# Altium PCB 宁波2号线PIS_数字功率放大器_网络音频(BHC-A-2030-02)_PCB(06001537)_V1.0.PcbDoc (part 1 of 7)
Units mm, origin at the board's own origin, x right, y up, seen from the top; angles counter-clockwise.
Board outline 86 x 96 mm, 4 copper layers (Top Layer, GND, VDD, Bottom Layer); 204 components, 185 nets, 781 pads, 267 vias.
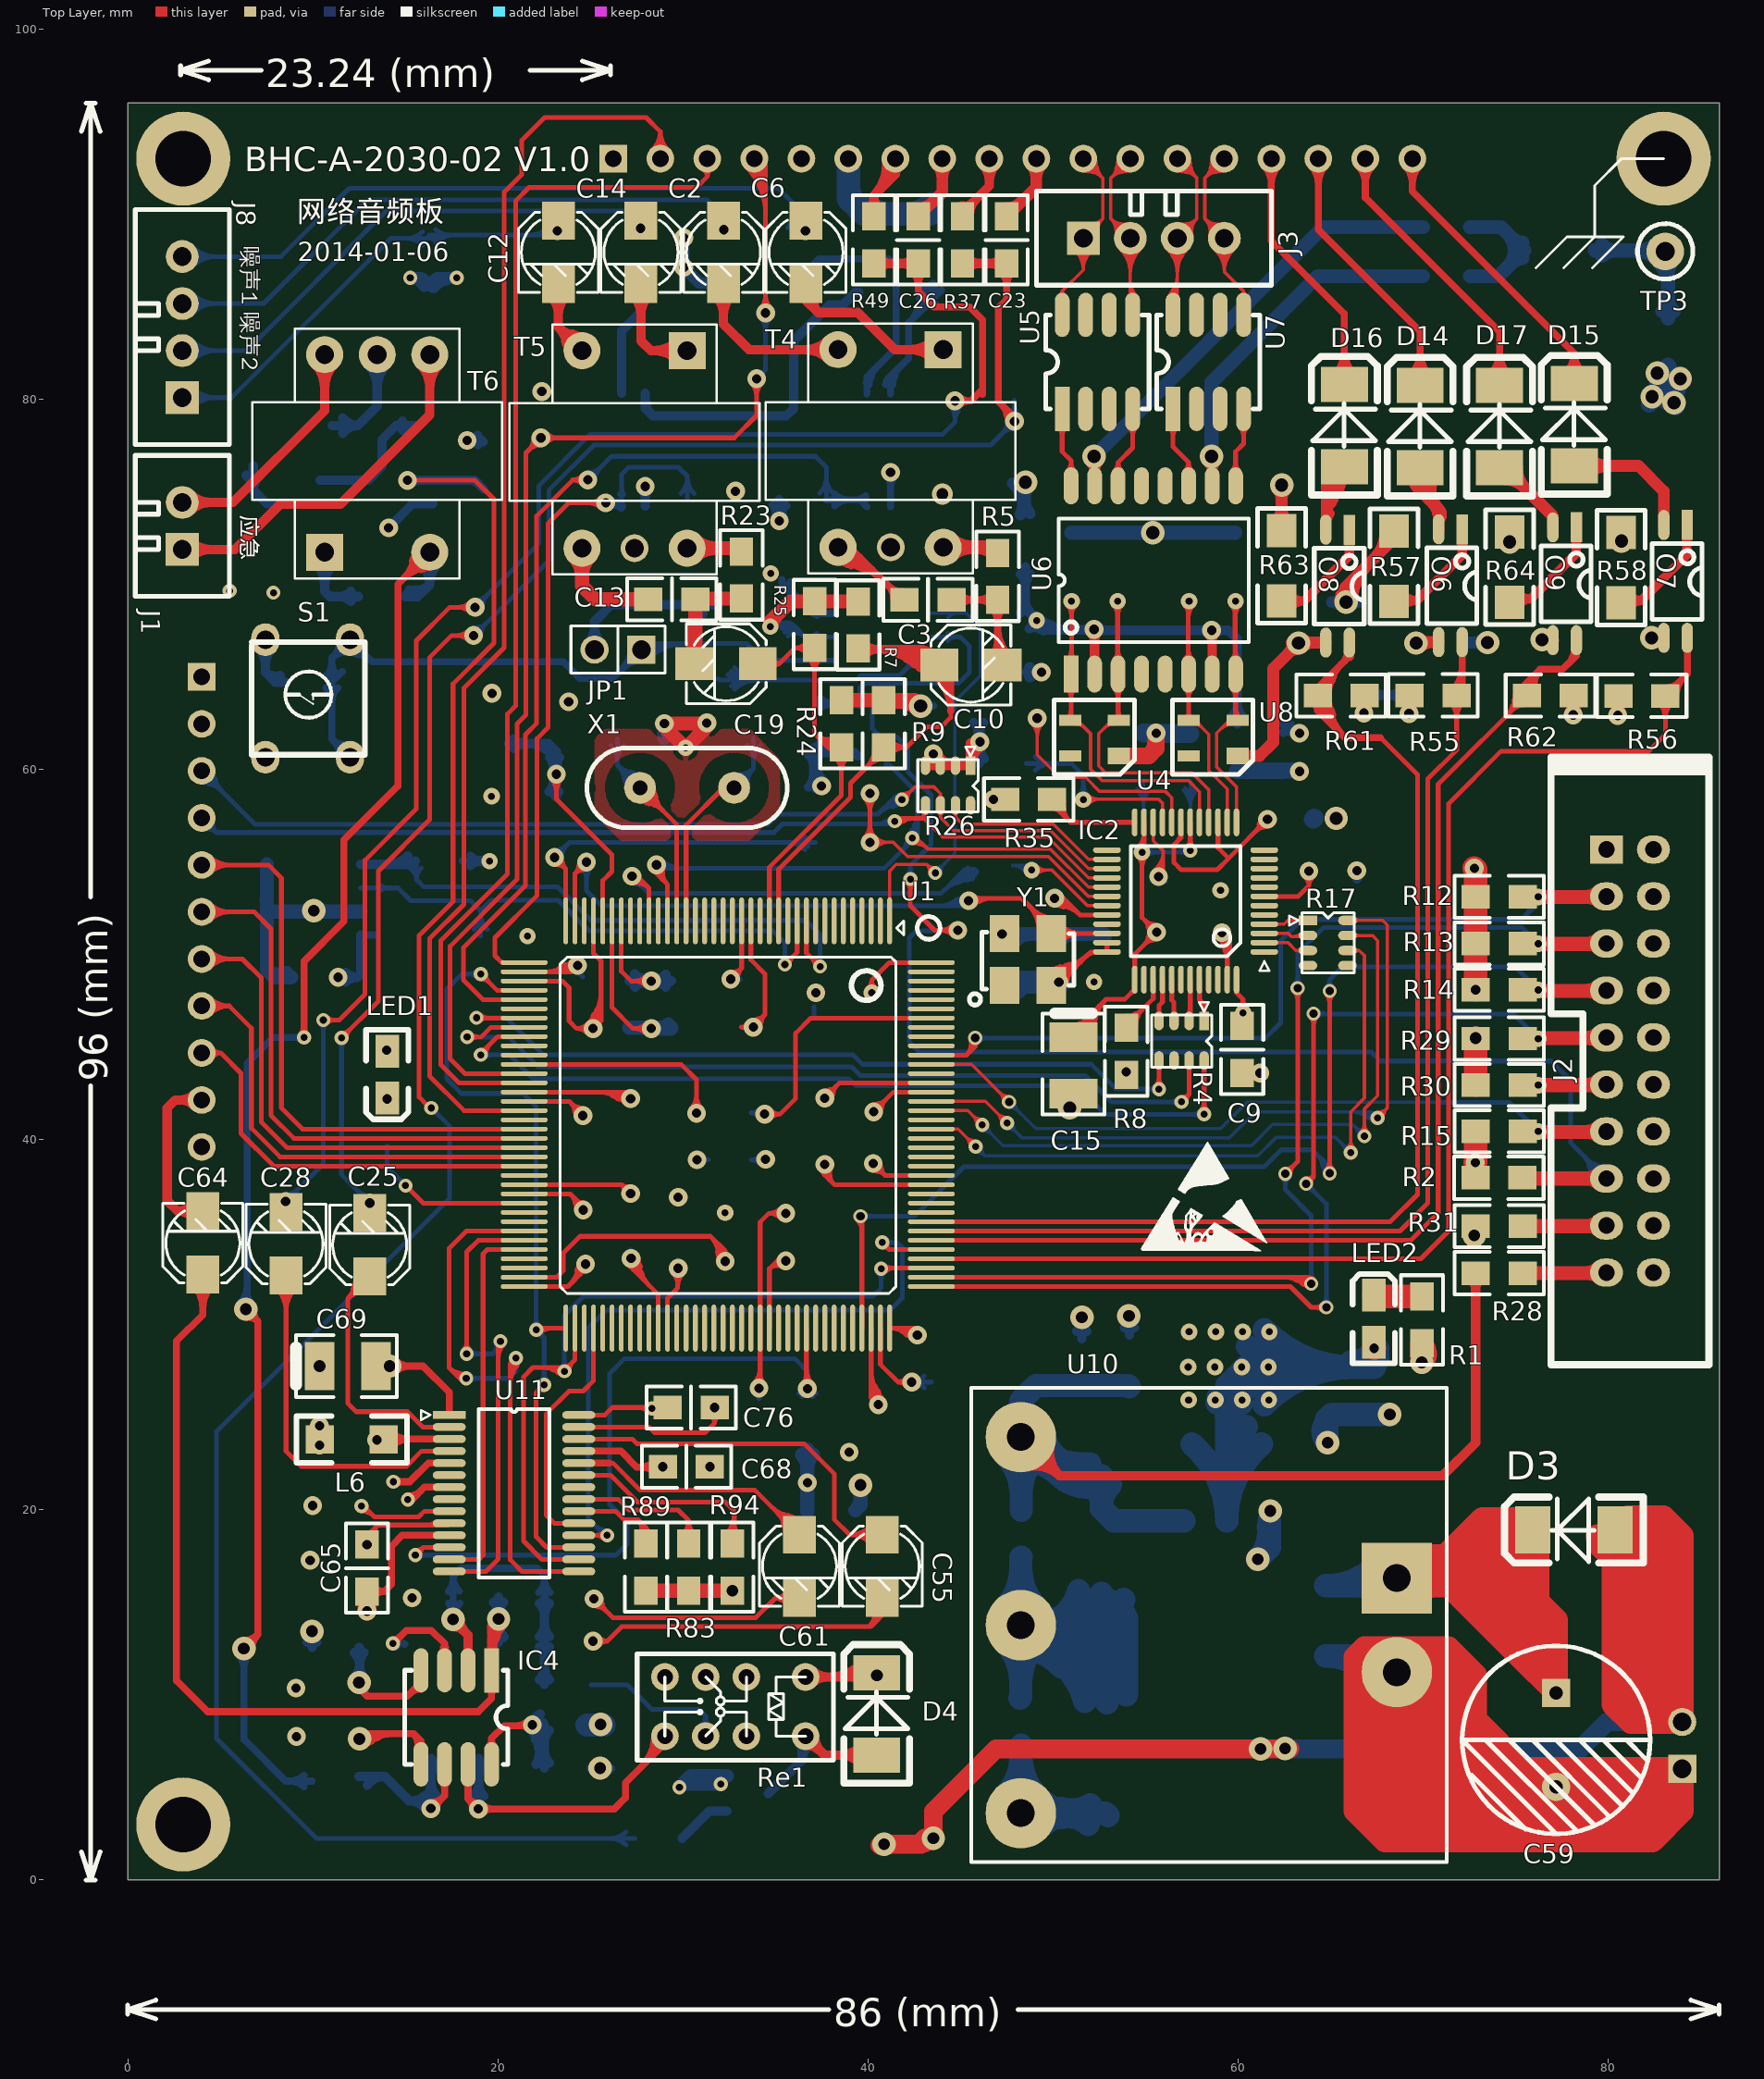
[diagram p0: Top Layer view]
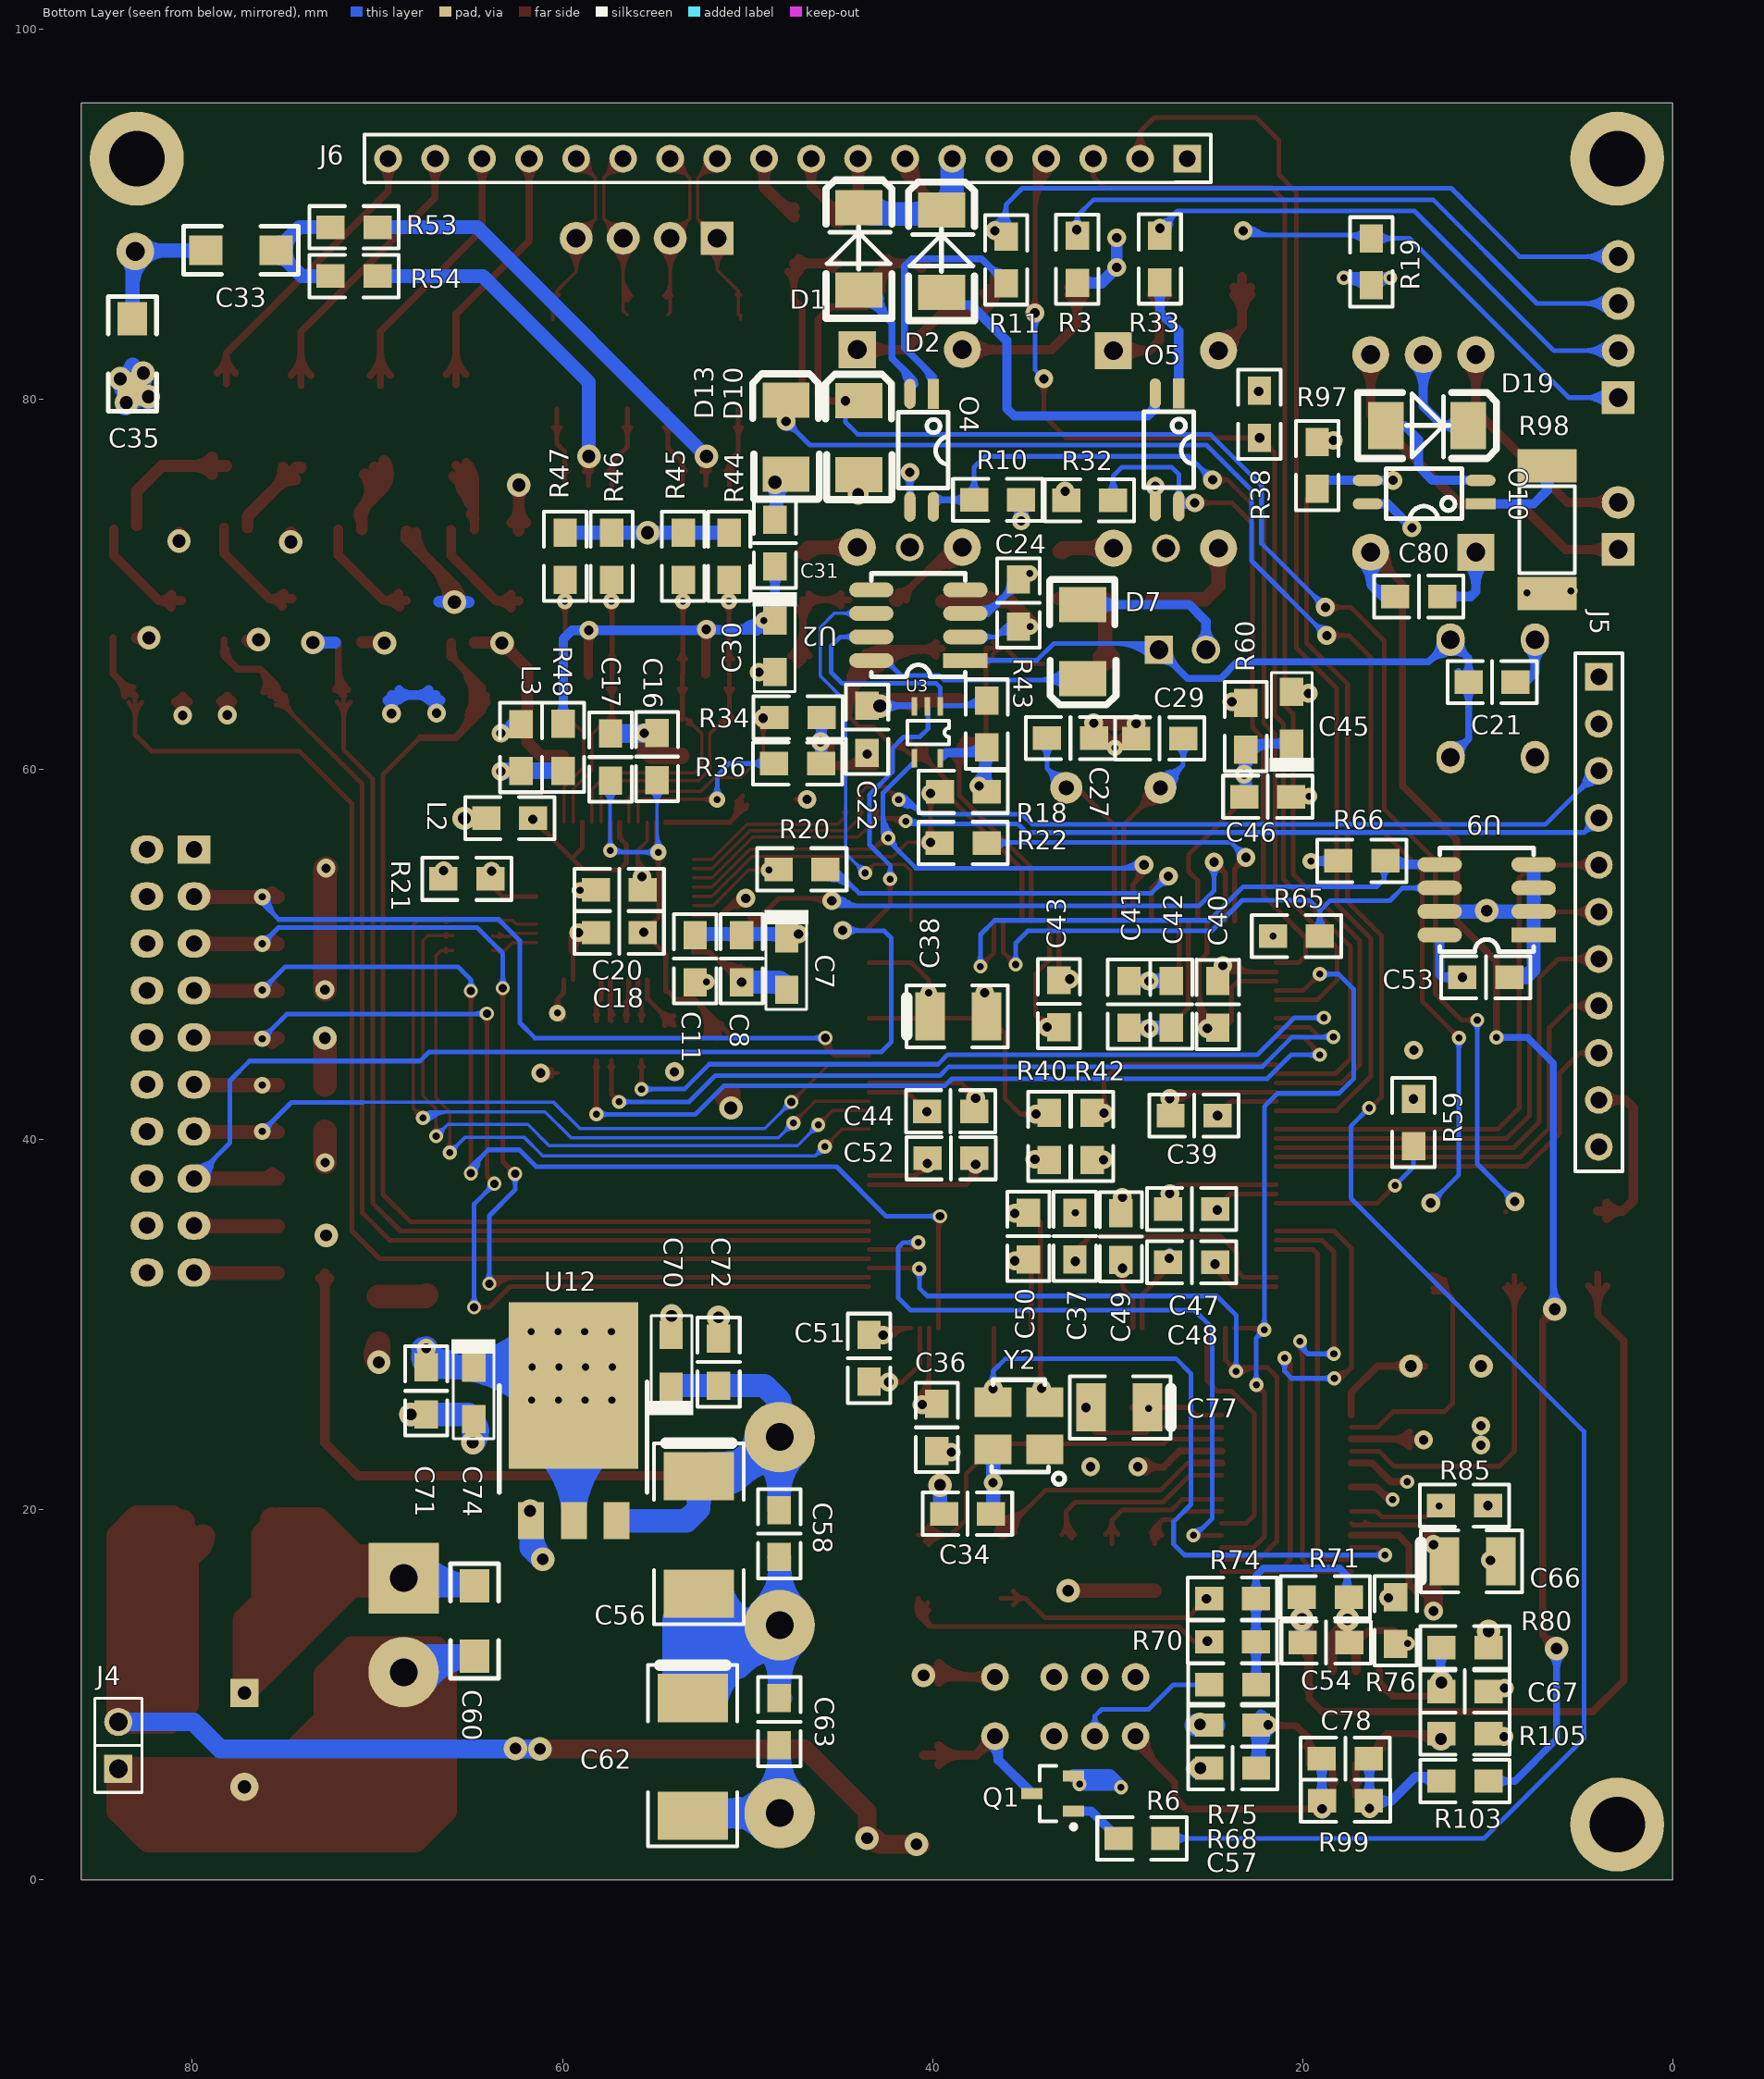
[diagram p1: Bottom Layer view, seen from below]
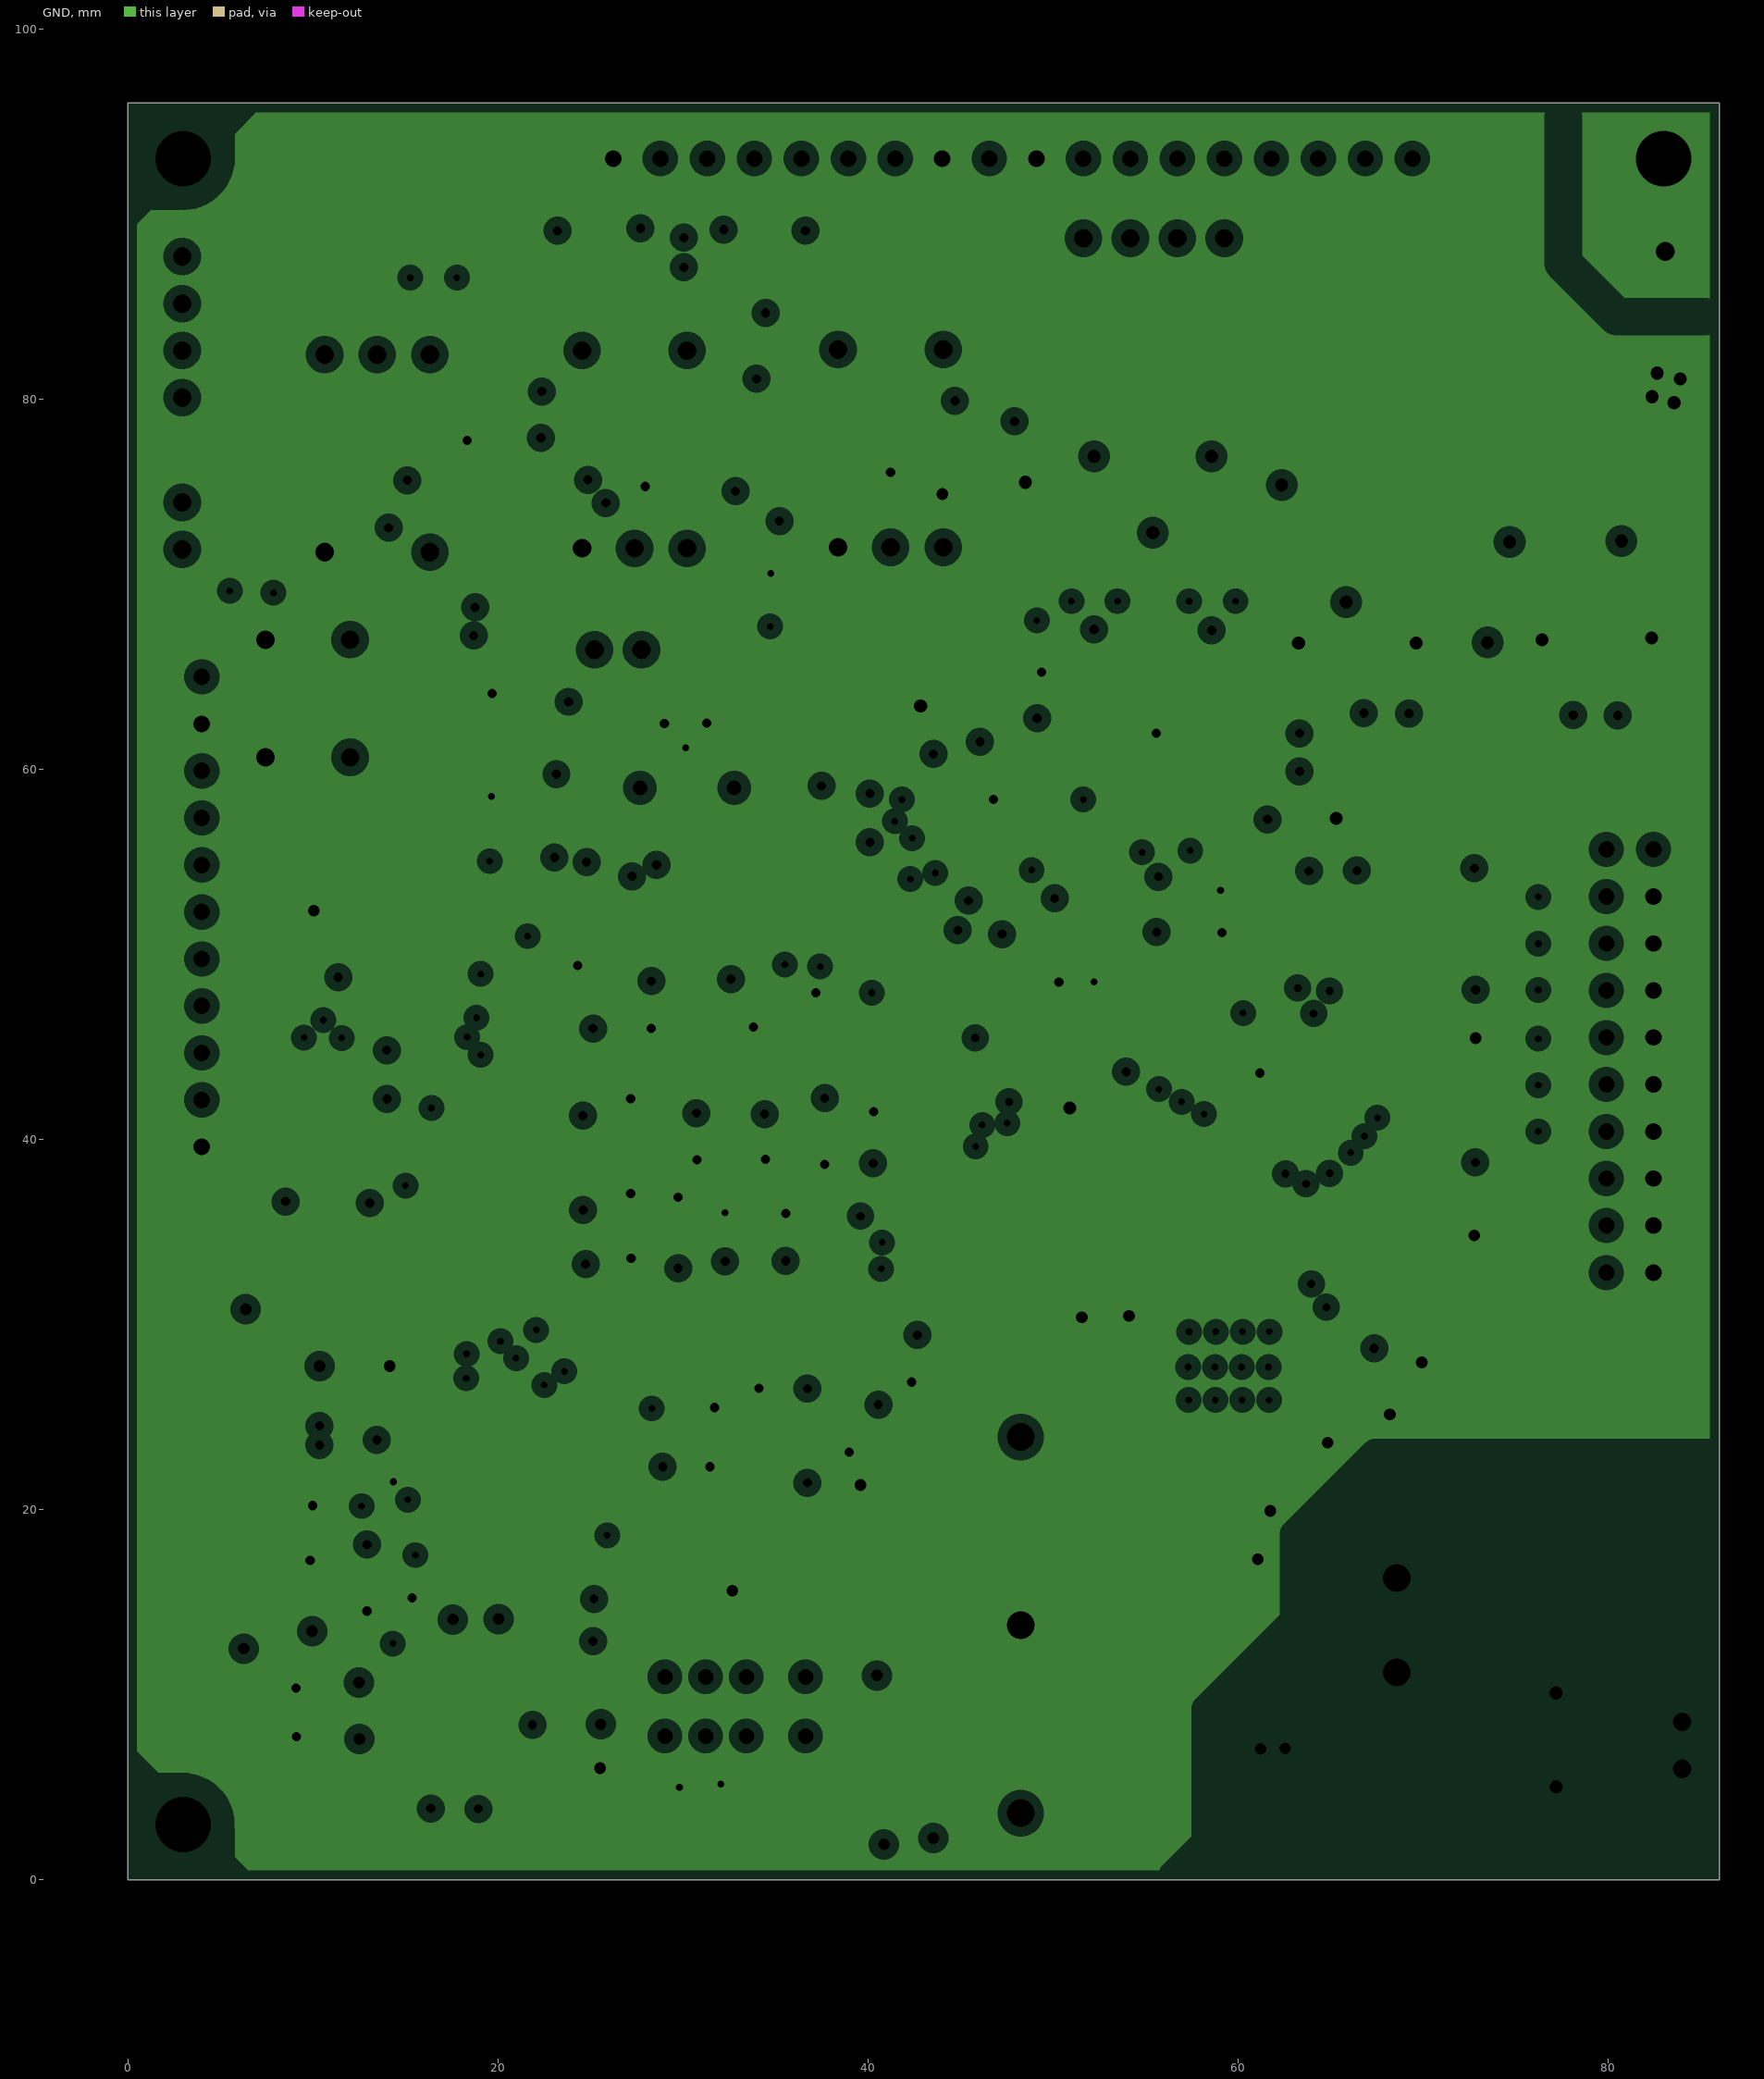
[diagram p2: GND, clearances drawn from the general rule]
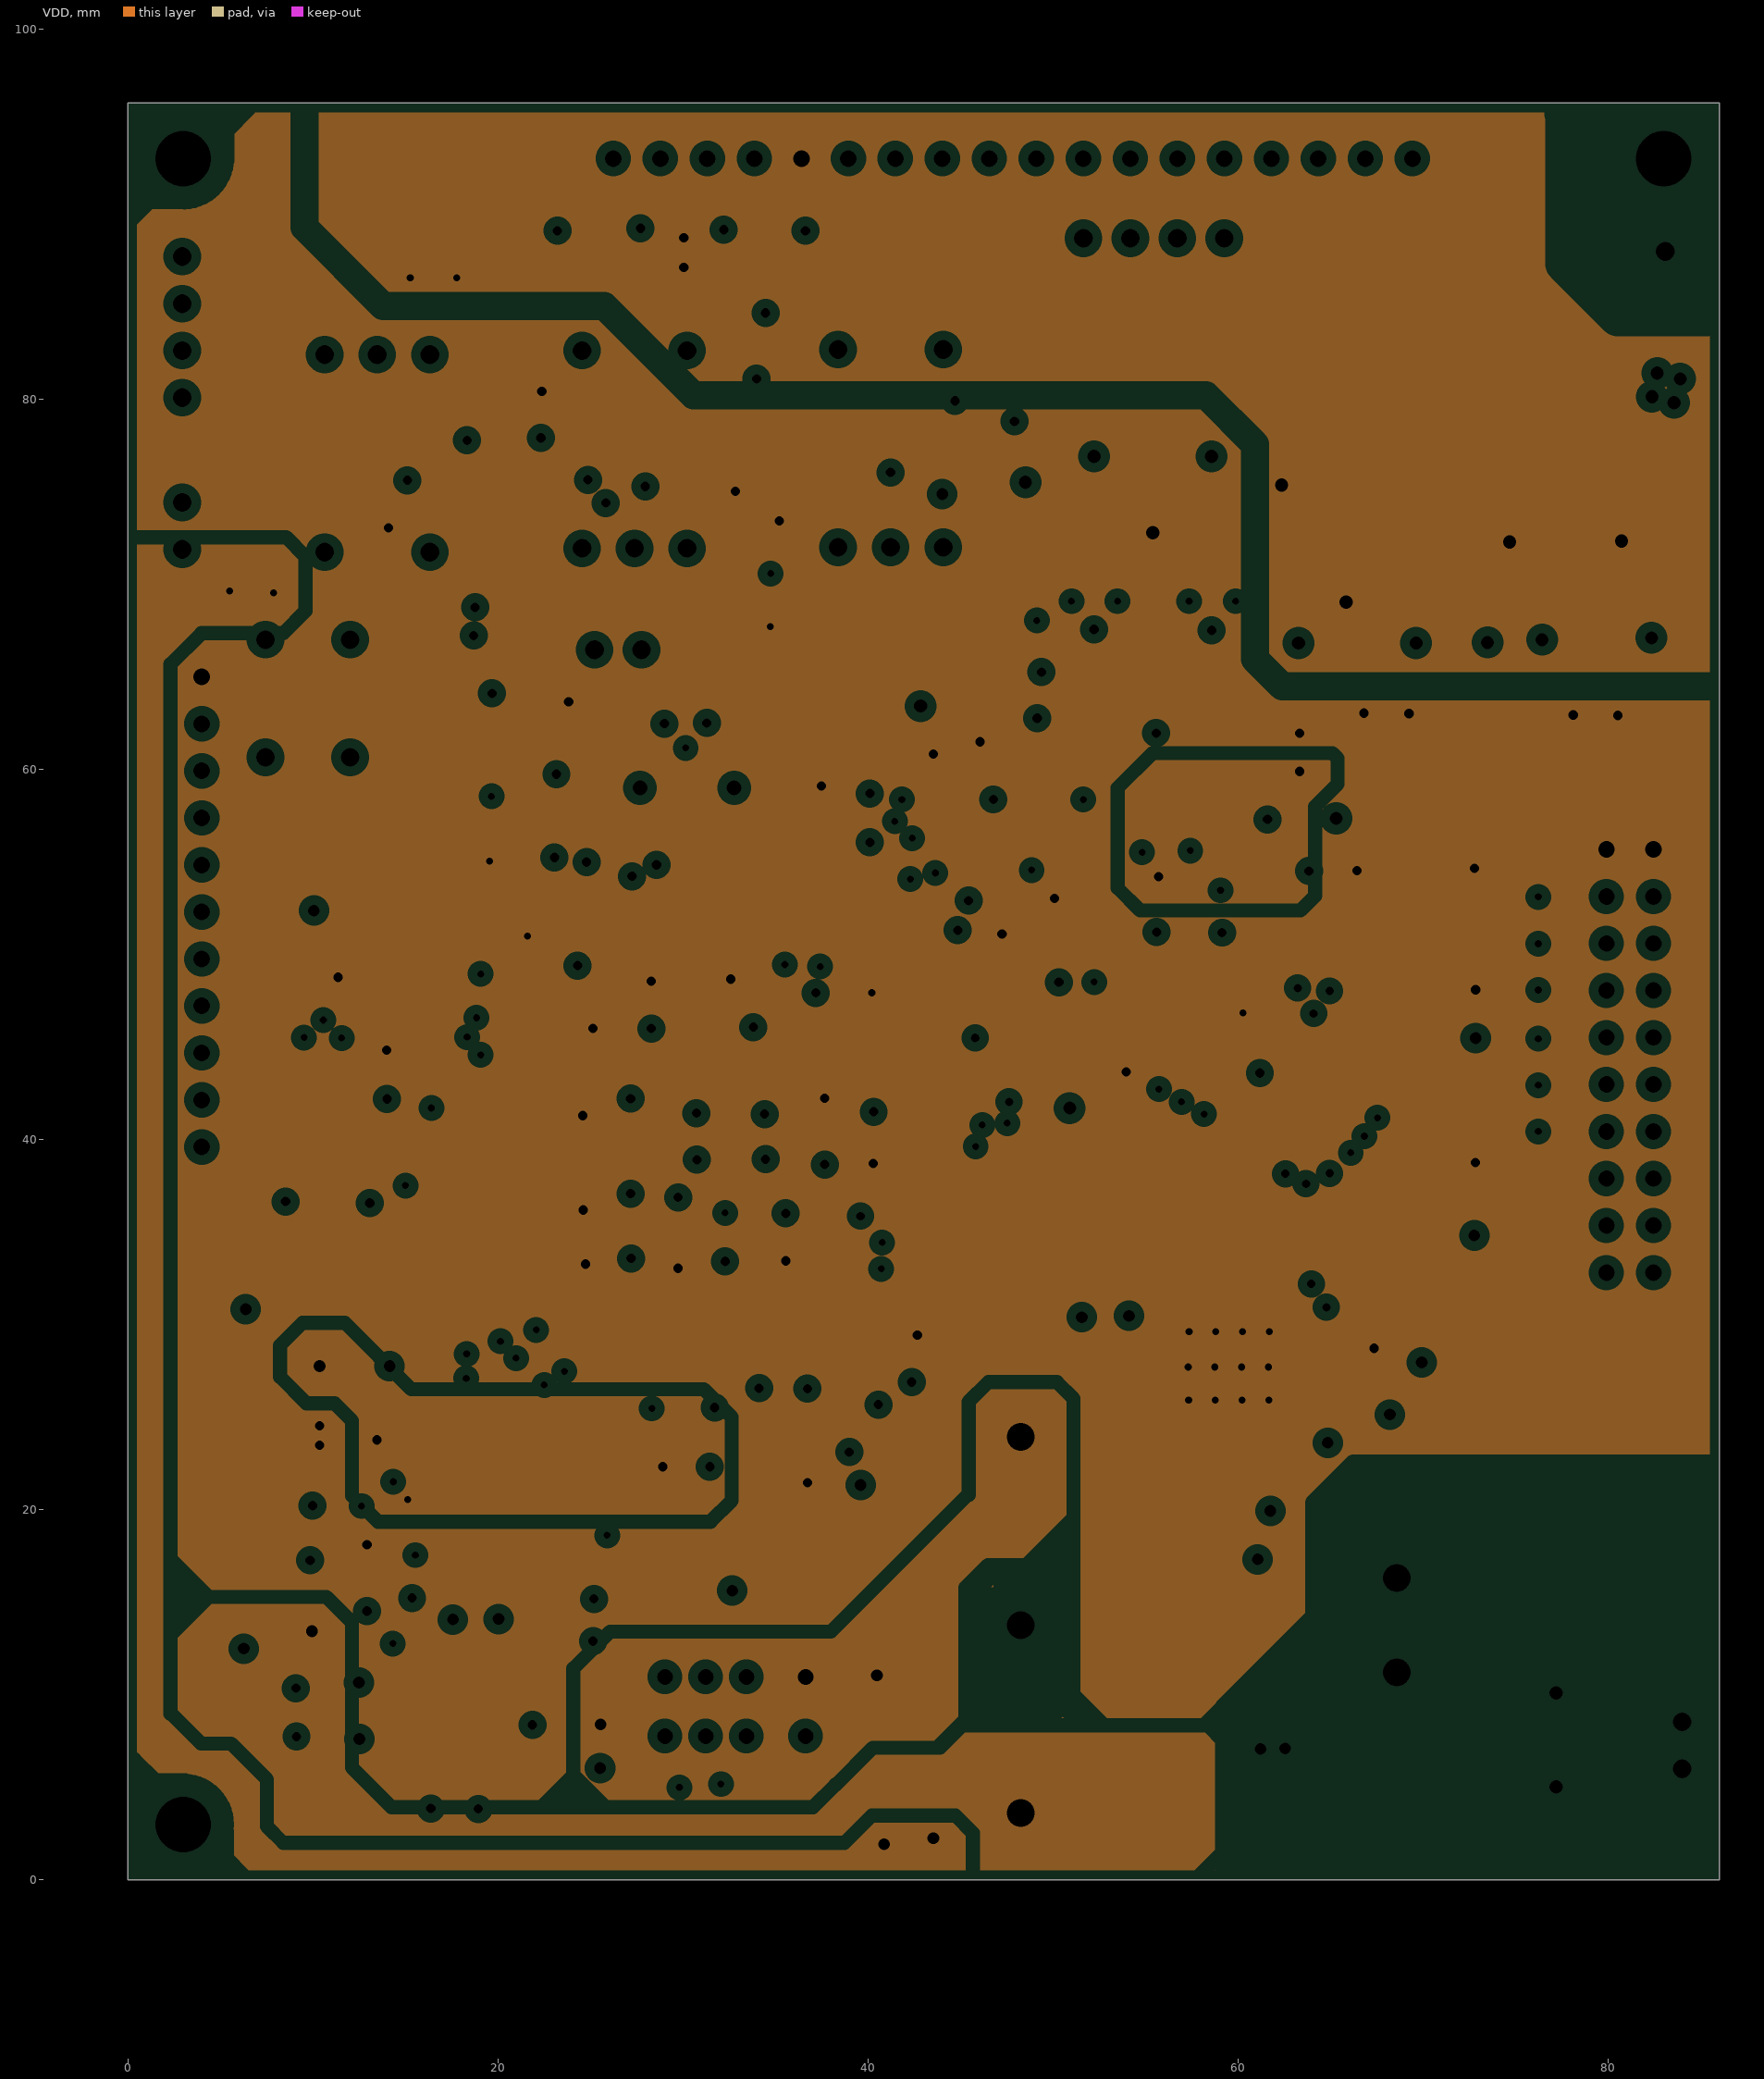
[diagram p3: VDD, clearances drawn from the general rule]
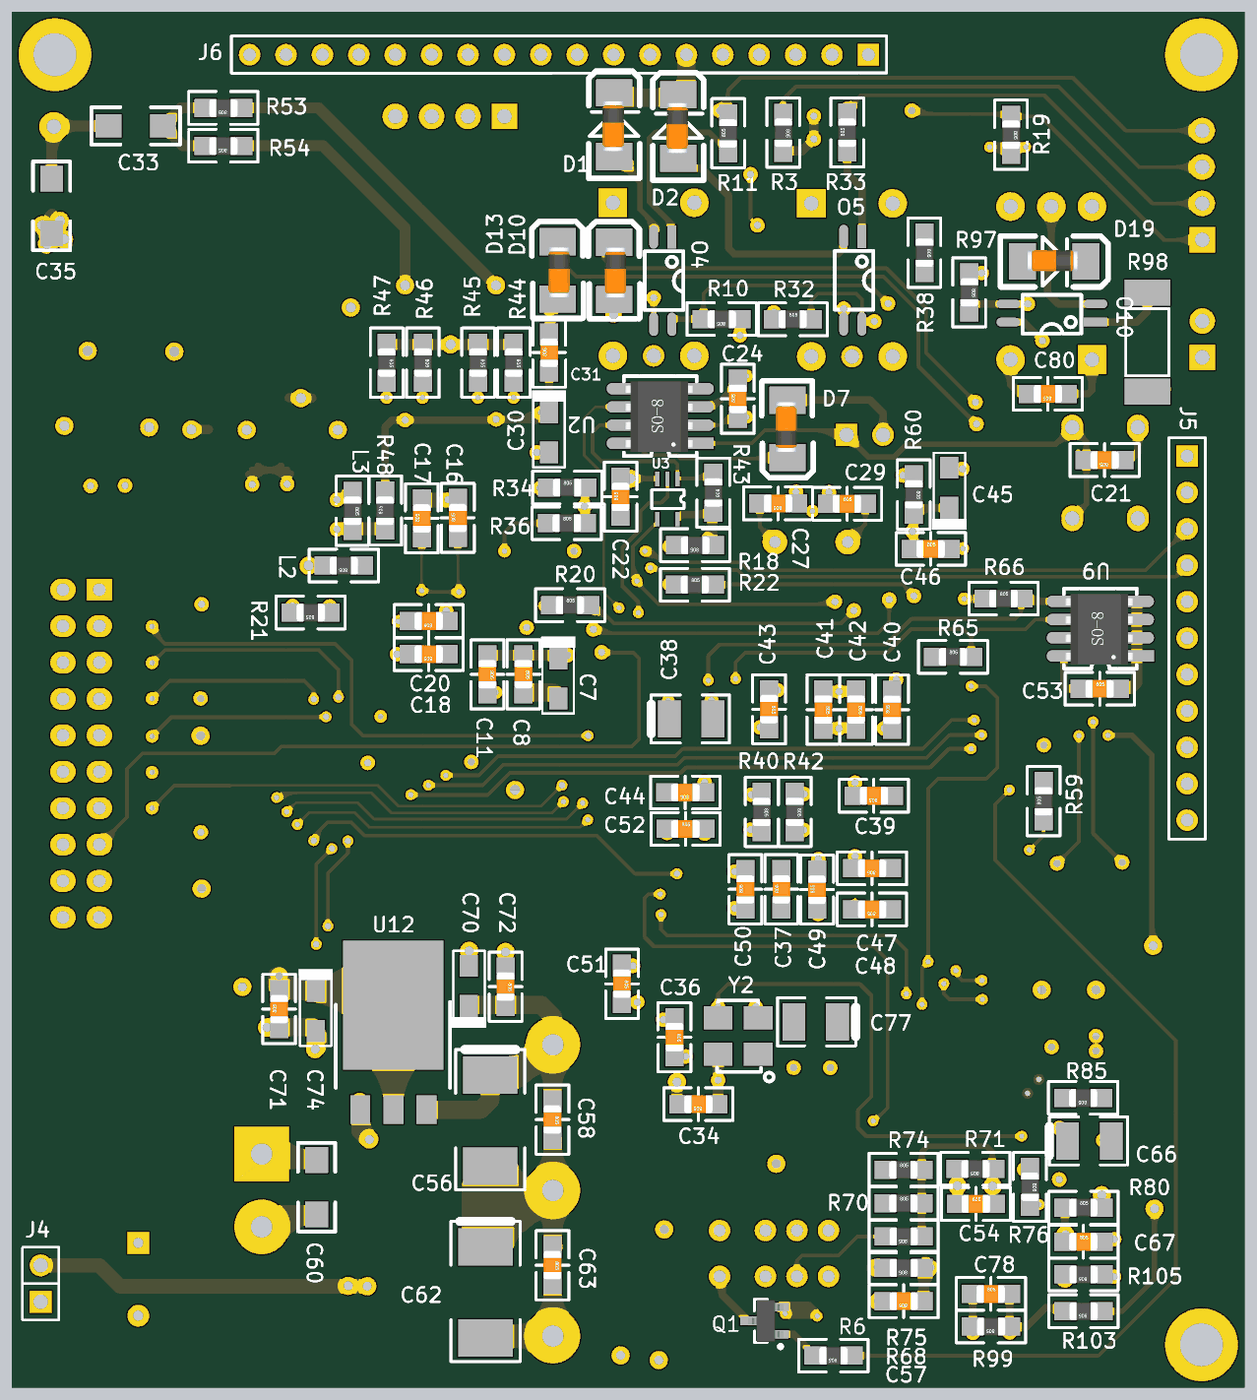
[diagram p10: 3D render of the assembled board from below, using the file's embedded part models]

## Layer stack, top to bottom
Top Layer: signal copper 0.0356
Dielectric: core 0.32, FR-4, Dk 4.8
GND: plane copper 0.0356, net (Multiple Nets)
Dielectric: prepreg 0.32, FR-4, Dk 4.8
VDD: plane copper 0.0356, net (Multiple Nets)
Dielectric: core 0.32, FR-4, Dk 4.8
Bottom Layer: signal copper 0.0356

## Board outline
0,0 0,96 86,96 86,0

## Design rules (kind name [scope] priority, off if disabled: settings)
Clearance [All] p1: gap=0.178
ComponentClearance [All] p1: gap=0 collisioncheckmode=3 verticalgap=0 showdistances=FALSE
DiffPairsRouting [All] p1: maxlimit=0.254 minlimit=0.254 mostfreqgap=0.254 maxuncoupledlength=12.7
HoleSize [All] p1: absolutevalues=TRUE maxlimit=12.7 minlimit=0.025 maxpercent=80.000 minpercent=20.000
HoleToHoleClearance [All] p1: gap=0 allowstackedmicrovias=TRUE
MinimumSolderMaskSliver [All] p1: minsoldermaskwidth=0
PlaneClearance [All] p1: clearance=0.508
PlaneConnect [All] p1: planeconnectstyle=Relief reliefexpansion=0.508 reliefentries=4 reliefconductorwidth=0.635 reliefairgap=0.381
PolygonConnect [All] p1: connectstyle=Relief reliefconductorwidth=0.254 reliefentries=4 polygonreliefangle="90 Angle" airgapwidth=0.254
RoutingVias [All] p1: holewidth=0.508 width=1.016 viastyle="Through Hole" minholewidth=0.381 minwidth=0.762 maxholewidth=0.711 maxwidth=1.27
SilkToSilkClearance [All] p1: silktosilkclearance=0
SilkToSolderMaskClearance [IsPad] p1: minsilkscreentomaskgap=0 clearancetoexposedcopper=TRUE
SolderMaskExpansion [All] p1: expansion=0.102
Width [All] p1: maxlimit=1.27 minlimit=0.178 preferedwidth=0.254 minimp=50.000000 maximp=50.000000 favimp=50.000000
19 further rules are at their usual default settings.

## Classes and differential pairs
component class 宁波2号线PIS-数字功率放大器（BHB-2430-02）-原理图-V0.1: J1 J4 J5 J6 J8 TP3
differential pair MB_TX: +MB_TX_P -MB_TX_N
differential pair MB_RX: +MB_RX_P -MB_RX_N
differential pair RD: +RD_P -RD_N
differential pair RX: +RX_P -RX_N
differential pair TD: +TD_P -TD_N
differential pair TX: +TX_P -TX_N

## Components (designator, comment, footprint, x,y, rotation, side; value= is the part's Value field where it differs from the comment)
C2 "10uF/25V" GC4*5.5 32.19,87.935 r90 top
C3 "" C0805 43.256,69.164 r0 top
C6 "10uF/25V" GC4*5.5 36.652,87.935 r90 top
C7 "" 3216A 47.879,49.479 r270 bottom
C8 "104" C0805 50.317,49.784 r90 bottom
C9 "104" C0805 60.223,44.856 r270 top
C10 "10uF/25V" GC4*5.5 45.568,65.634 r180 top
C11 "104" C0805 52.832,49.784 r90 bottom
C12 "10uF/25V" GC4*5.5 23.266,87.935 r90 top
C13 "" C0805 29.413,69.19 r0 top
C14 "10uF/25V" GC4*5.5 27.728,87.935 r90 top
C15 "10uF/16V" CAP-B 51.105,45.542 r270 top
C16 "104" C0805 54.889,60.681 r270 bottom
C17 "104" C0805 57.404,60.655 r270 bottom
C18 "104" C0805 56.921,51.181 r180 bottom
C19 "10uF/25V" GC4*5.5 32.334,65.71 r0 top
C20 "104" C0805 56.921,53.492 r180 bottom
C21 "102" C0805 9.754,64.719 r180 bottom
C22 "104" C0805 43.536,62.154 r270 bottom
C23 "" C0805 47.498,88.595 r270 top
C24 "104" C0805 35.357,68.986 r270 bottom
C25 "10uF/25V" GC4*5.5 13.081,34.315 r270 top
C26 "" C0805 42.717,88.595 r270 top
C27 "" C0805 32.537,61.697 r180 bottom
C28 "10uF/25V" GC4*5.5 8.56,34.366 r270 top
C29 "22pF" C0805 27.737,61.671 r0 bottom
C30 "10uF/10V" 3216A 48.514,66.65 r270 bottom
C31 "104" C0805 48.514,72.212 r270 bottom
C33 "1000p(2KV)" C1206 77.368,88.036 r180 bottom
C34 "104" C0805 38.1,19.787 r180 bottom
C35 "1000p(2KV)" C1206 83.236,82.448 r270 bottom
C36 "2.2uF" C0805 39.776,24.46 r90 bottom
C37 "2.2uF" C0805 32.309,34.773 r270 bottom
C38 "" CAP-B 40.132,46.66 r180 bottom
C39 "104" C0805 25.857,41.3 r180 bottom
C40 "104" C0805 24.587,47.295 r270 bottom
C41 "104" C0805 29.388,47.32 r90 bottom
C42 "104" C0805 27.102,47.32 r90 bottom
C43 "104" C0805 33.172,47.346 r90 bottom
C44 "104" C0805 39.014,41.529 r180 bottom
C45 "" 3216A 20.599,62.789 r90 bottom
C46 "104" C0805 21.895,58.522 r0 bottom
C47 "104" C0805 25.984,36.246 r180 bottom
C48 "104" C0805 25.984,33.376 r180 bottom
C49 "104" C0805 29.82,34.747 r270 bottom
C50 "104" C0805 34.823,34.773 r270 bottom
C51 "104" C0805 43.434,28.194 r90 bottom
C52 "104" C0805 39.014,38.989 r0 bottom
C53 "104" C0805 10.109,48.768 r0 bottom
C54 "47pF" C0805 18.745,12.827 r0 bottom
C55 "10uF/25V" GC4*5.5 40.767,16.942 r90 top
C56 "100uF/16V" CAP-D 52.629,21.819 r270 bottom
C57 "104" C0805 23.773,6.045 r180 bottom
C58 "104" C0805 48.285,18.72 r90 bottom
C59 "100uF/16V" E100 77.191,10.109 r270 top
C60 "" M1206 64.745,13.995 r90 bottom
C61 "10uF/25V" GC4*5.5 36.297,16.942 r90 top
C62 "100uF/16V" CAP-D 52.959,9.83 r270 bottom
C63 "104" C0805 48.285,8.56 r90 bottom
C64 "10uF/25V" GC4*5.5 4.064,34.417 r270 top
C65 "104" C0805 12.929,16.84 r270 top
C66 "10uF/16V" CAP-B 12.344,17.221 r180 bottom
C67 "104" C0805 11.244,10.185 r0 bottom
C68 "104" C0805 30.201,22.327 r0 top
C69 "10uF/16V" CAP-B 10.363,27.762 r0 top
C70 "10uF/10V" 3216A 54.127,28.042 r90 bottom
C71 "104" C0805 67.361,26.416 r270 bottom
C72 "104" C0805 51.562,27.991 r90 bottom
C74 "22uF/6.3V" 3216A 64.795,26.289 r270 bottom
C76 "104" C0805 30.455,25.527 r0 top
C77 "10uF/16V" CAP-B 28.397,25.526 r0 bottom
C78 "47pF" C0805 17.704,6.553 r0 bottom
C80 "100p" C0805 13.716,69.342 r180 bottom
D1 "DIODE" 7227AK 43.993,88.113 r90 bottom
D2 "DIODE" 7227AK 39.522,87.986 r90 bottom
D3 "DIODE" 7227AK 78.156,18.898 r180 top
D4 "1N4004" 7227AK 40.462,8.966 r90 top
D7 "" 1206AK 31.877,66.904 r270 bottom
D10 "" 1206AK 43.993,77.927 r90 bottom
D13 "" 1206AK 47.93,77.953 r90 bottom
D14 "DIODE" 7227AK 69.825,78.511 r90 top
D15 "DIODE" 7227AK 78.156,78.613 r90 top
D16 "DIODE" 7227AK 65.735,78.562 r90 top
D17 "DIODE" 7227AK 74.117,78.511 r90 top
D19 "DIODE" 7227AK 13.284,78.588 r180 bottom
IC2 "DP83848C" LQFP48 61.417,50.14 r180 top locked
IC4 "MC4558" SO-8 19.66,11.328 r270 top
J1 "CON2" CH2.54-2 2.946,71.882 r90 top
J2 "IDC20" IDC3-20 79.908,55.677 r270 top
J3 "CON4" CH2.54-4 51.638,88.697 r0 top locked
J4 "CON2" SIP2.54-2 84,6 r90 bottom locked
J5 "CON11" SIP2.54-11 4,65 r90 bottom
J6 "CON18" SIP2.54-18 26.24,93 r0 bottom
J8 "CON4" CH2.54-4 2.946,80.086 r90 top
JP1 "2.54-2P" SIP2.54-2 27.762,66.472 r180 top
L2 "100R@100M" M0805 62.84,57.353 r0 bottom
L3 "100R@100M" M0805 62.23,61.189 r270 bottom
L6 "10uH" L1206 13.818,23.8 r180 top
LED1 "" LED(贴片) 14.021,44.78 r90 top
LED2 "" LED(贴片) 67.335,29.058 r270 top
O4 "TLP281" SOP4 39.954,80.289 r270 bottom
O5 "TLP281" SOP4 26.695,80.315 r270 bottom
O6 "TLP281" SOP4 72.111,72.974 r270 top
O7 "TLP281" SOP4 84.277,73.203 r270 top
O8 "TLP281" SOP4 66.015,72.949 r270 top
O9 "TLP281" SOP4 78.283,73.076 r270 top
O10 "TLP281" SOP4 10.389,74.346 r0 bottom
Q1 "MMBT5551" SOT-23B_N 33.503,4.674 r0 bottom
R1 "" M0805 69.926,30.251 r90 top
R2 "10K" M0805 74.092,37.948 r0 top
R3 "" M0805 32.172,87.565 r270 bottom
R4 "33*4" PZ-4-0.8B 58.166,46.152 r180 top
R5 "" M0805 47.015,70.434 r270 top
R6 "Res3" M0805 28.677,2.235 r0 bottom
R7 "" M0805 39.472,67.793 r90 top
R8 "10K" M0805 53.95,44.755 r90 top
R9 "" M0805 40.843,62.459 r90 top
R10 "" M0805 36.474,74.549 r0 bottom
R11 "" M0805 36.032,87.514 r90 bottom
R12 "10K" M0805 74.117,53.111 r180 top
R13 "10K" M0805 74.101,50.597 r0 top
R14 "10K" M0805 74.117,48.082 r180 top
R15 "10K" M0805 74.117,40.437 r180 top
R17 "33*4" PZ-4-0.8B 64.033,51.841 r270 top
R18 "10K" M0805 38.329,58.776 r0 bottom
R19 "" M0805 16.281,87.427 r270 bottom
R20 "" M0805 47.066,54.61 r180 bottom
R21 "10K" M0805 65.151,54.077 r0 bottom
R22 "" M0805 38.354,56.032 r180 bottom
R23 "" M0805 33.172,70.51 r270 top
R24 "" M0805 38.557,62.459 r90 top
R25 "" M0805 37.109,67.818 r90 top
R26 "" PZ-4-0.8B 45.542,59.944 r180 top
R28 "0R" M0805 74.101,32.791 r0 top
R29 "10K" M0805 74.101,45.466 r0 top
R30 "10K" M0805 74.101,42.955 r0 top
R31 "10K" M0805 74.101,35.331 r0 top
R32 "" M0805 31.521,74.549 r180 bottom
R33 "" M0805 27.727,87.565 r90 bottom
R34 "10K" M0805 47.269,62.814 r180 bottom
R35 "" M0805 48.692,58.369 r180 top
R36 "10K" M0805 47.295,60.325 r180 bottom
R37 "" M0805 45.116,88.613 r270 top
R38 "" M0805 22.327,79.197 r270 bottom
R40 "10K" M0805 33.68,40.183 r270 bottom
R42 "10K" M0805 31.369,40.183 r270 bottom
R43 "" M0805 37.059,62.459 r270 bottom
R44 "" M0805 50.978,71.526 r270 bottom
R45 "" M0805 53.467,71.526 r270 bottom
R46 "" M0805 57.328,71.526 r270 bottom
R47 "" M0805 59.842,71.526 r270 bottom
R48 "" M0805 59.969,61.189 r90 bottom
R49 "" M0805 40.335,88.613 r270 top
R53 "" M0805 71.247,89.281 r0 bottom
R54 "" M0805 71.247,86.639 r0 bottom
R55 "" M0805 70.536,64.008 r0 top
R56 "" M0805 81.813,63.983 r0 top
R57 "" M1206 68.428,70.968 r90 top
R58 "" M1206 80.696,70.891 r90 top
R59 "" M0805 14.021,40.919 r90 bottom
R60 "" M0805 23.063,62.332 r270 bottom
R61 "" M0805 65.583,63.983 r180 top
R62 "" M0805 76.886,63.983 r180 top
R63 "" M1206 62.357,70.993 r90 top
R64 "" M1206 74.676,70.917 r90 top
R65 "" M0805 20.345,51.003 r180 bottom
R66 "" M0805 16.815,55.067 r180 bottom
R68 "100R" M0805 23.774,8.357 r0 bottom
R70 "15k" M0805 23.8,12.878 r180 bottom
R71 "11k" M0805 18.771,15.265 r0 bottom
R74 "10k" M0805 23.8,15.215 r180 bottom
R75 "10k" M0805 23.774,10.541 r0 bottom
R76 "10k" M0805 14.961,14.021 r270 bottom
R80 "100R" M0805 11.243,12.573 r180 bottom
R83 "" M0805 30.302,16.891 r90 top
R85 "" M0805 11.252,20.218 r0 bottom
R89 "" M0805 27.991,16.891 r90 top
R94 "" M0805 32.664,16.891 r90 top
R97 "" M0805 19.202,76.429 r270 bottom
R98 "" 1T-2512 6.782,72.949 r270 bottom
R99 "11k" M0805 17.678,4.267 r0 bottom
R103 "10k" M0805 11.227,5.334 r0 bottom
R105 "10k" M0805 11.227,7.899 r0 bottom
Re1 "AGN20012 G6J-2P-Y" G6J-2P 36.627,10.973 r270 top
S1 "SW-PB" KEY-6A 9.728,63.83 r270 top
T4 "EE13" EE13-C#1 44.069,82.677 r270 top locked
T5 "EE13" EE13-C#1 30.226,82.626 r270 top locked
T6 "1:1" EE13-C#2 10.643,71.73 r90 top
TP3 "TP" TP 83.083,87.986 r0 top
U1 "STM32F207Zx" LQFP144 41.173,51.816 r180 top locked
U2 "MAX706R" so-8 38.227,65.888 r0 bottom
U3 "74LVC1G08" SOT-23-5+ 39.573,63.398 r270 bottom
U4 "SR3.3" SOT-143 53.569,60.731 r90 top
U5 "PLC03-3.3" SO-8 50.495,79.477 r90 top
U6 "H1102" SOP-16 50.978,65.151 r90 top
U7 "PLC03-3.3" SO-8 56.49,79.477 r90 top
U8 "SR3.3" SOT-143 59.969,60.731 r90 top
U9 "AT24C32-2.7" SO-8 7.518,51.054 r0 bottom
U10 "" YND5-48D12 68.58,13.767 r180 top locked
U11 "UDA1341TS" TSSOP28N 17.374,25.121 r0 top
U12 "AS2815AR-3.3" TO-252-1 61.697,19.406 r180 bottom
X1 "25MHz" XTAL-D 27.686,59.004 r0 top
Y1 "50MHz" XTAL-XO53 47.371,48.336 r0 top
Y2 "11.2896MHz" XTAL-XO53 33.934,23.266 r90 bottom

## Footprints (in the part's own frame and the unit in brackets; to place one, negate y for a bottom-side part, rotate by r counter-clockwise, add the part's x,y. Pads: shape width x height; smd on the part's side, far side on the other; paste and mask are expansions set on the pad)
1T-2512 [mm] "Chip Resistor; Body 6.4 x 3.2 mm (LxW typ)"
  rect 1.8x3.2 smd: 1(-3.45,0) 2(3.45,0)
  silkscreen extent -2.35,-1.5 2.35,1.5, body extent -3.66,-1.5 3.66,1.5, height 1
1206AK [mm]
  rect 1.905x2.54 smd: A(-2,-0.013) K(2,-0.013)
  silkscreen extent -3.35,-1.8 3.42,1.79, body extent -1.88,-0.85 1.62,0.65, height 0.75
3216A [mil]
  rect 60x50 smd: 1(-55,0) 2(55,0)
  silkscreen extent -115,-48 96,46
7227AK [mm]
  rect 1.905x2.54 smd: A(-2.216,-0.013) K(2.229,-0.013)
  silkscreen extent -3.74,-1.79 3.75,1.77, body extent -1.85,-0.7 1.65,0.8, height 1.45
C0805 [mil]
  rect 60x50 smd: 1(-50.36,-0.05) 2(49.64,-0.05)
  silkscreen extent -95,-45 95,45, body extent -39,-25 39,25, height 31
C1206 [mm]
  rect 1.8x1.6 smd: 1(-1.9,0) 2(1.9,0)
  silkscreen extent -3.1,-1.3 3.1,1.3, body extent -1.96,-1.3 1.9,1.3, height 1.5
CAP-B [mm] "钽电容10uF/10V"
  rect 1.6x2.6 smd: 1(0,0) 2(3.048,0)
  silkscreen extent -1.27,-1.68 4.19,1.68
CAP-D [mm] "钽电容100uF/16V"
  rect 2.6x3.8 smd: 1(0,0) 2(6.35,0)
  silkscreen extent -1.78,-2.41 8,2.41
CH2.54-2 [mil]
  rect 70x70 hole 40: 1(0,0)
  round 70 hole 40: 2(100,0)
  silkscreen extent -100,-100 200,100, body extent -100,-100 200,100, height 276
CH2.54-4 [mil]
  rect 70x70 hole 40: 1(0,0)
  round 70 hole 40: 2(100,0) 3(200,0) 4(300,0)
  silkscreen extent -100,-100 400,100
E100 [mil]
  rect 60x60 hole 28: 1(0,0)
  round 60 hole 28: 2(200,0)
  silkscreen extent -100,-200 300,200
EE13-C#1 [mm]
  rect 2x2 hole 1.016: 1(0,0)
  round 2 hole 1.016: 2(0,-5.68) 3(10.68,0) 5(10.68,-5.68)
  round 1.5 hole 1.016: 4(10.68,-2.84)
  silkscreen extent -1.41,-9.59 12.09,3.91, body extent -1.41,-9.59 12.09,3.91, height 9.35
EE13-C#2 [mm]
  rect 2x2 hole 1.016: 1(0,0)
  round 2 hole 1.016: 2(0,-5.68) 3(10.68,0) 4(10.68,-2.84) 5(10.68,-5.68)
  silkscreen extent -1.41,-9.59 12.09,3.91, body extent -1.41,-9.59 12.09,3.91, height 9.35
G6J-2P [mm] "W5.7*L10.6*H9"
  round 1.5 hole 0.85: 1(0,0) 2(0,-3.2) 3(0,-5.4) 4(0,-7.6) 5(3.2,-7.6) 6(3.2,-5.4) 7(3.2,-3.2) 8(3.2,0)
  silkscreen extent -1.25,-9.1 4.5,1.5
GC4*5.5 [mil]
  rect 80x70 smd: 1(67.2,-0.18) 2(-67.8,-0.18)
  silkscreen extent -85,-85 85,85
IDC3-20 [mil] "JTAG"
  rect 60x70 hole 35: 1(0,0)
  oval 60x70 hole 35: 2(0,100) 3(100,0) 4(100,100) 5(200,0) 6(200,100) 7(300,0) 8(300,100) 9(400,0) 10(400,100) 11(500,0) 12(500,100) 13(600,0) 14(600,100) 15(700,0) 16(700,100) 17(800,0) 18(800,100) 19(900,0) 20(900,100)
  silkscreen extent -196,-118 1096,218
KEY-6A [mil]
  oval 70x60 hole 40: 1(-125,-90) 1(125,-90) 2(-125,90) 2(125,90)
  silkscreen extent -120,-119 120,121
L1206 [mil] "10uH"
  rect 60x60 smd: 1(0,0) 2(135,0)
  silkscreen extent -50,-50 185,50
LED(贴片) [mil]
  rect 70x50 smd: 1(0,0) 2(-100,0)
  silkscreen extent -145,-45 45,45
LQFP48 [mm]
  oval 1.5x0.3 smd: 1(0,0) 2(0,-0.5) 3(0,-1) 4(0,-1.5) 5(0,-2) 6(0,-2.5) 7(0,-3) 8(0,-3.5) 9(0,-4) 10(0,-4.5) 11(0,-5) 12(0,-5.5) 25(8.5,-5.5) 26(8.5,-5) 27(8.5,-4.5) 28(8.5,-4) 29(8.5,-3.5) 30(8.5,-3) 31(8.5,-2.5) 32(8.5,-2) 33(8.5,-1.5) 34(8.5,-1) 35(8.5,-0.5) 36(8.5,0)
  oval 0.3x1.5 smd: 13(1.5,-7) 14(2,-7) 15(2.5,-7) 16(3,-7) 17(3.5,-7) 18(4,-7) 19(4.5,-7) 20(5,-7) 21(5.5,-7) 22(6,-7) 23(6.5,-7) 24(7,-7) 37(7,1.5) 38(6.5,1.5) 39(6,1.5) 40(5.5,1.5) 41(5,1.5) 42(4.5,1.5) 43(4,1.5) 44(3.5,1.5) 45(3,1.5) 46(2.5,1.5) 47(2,1.5) 48(1.5,1.5)
  silkscreen extent -0.27,-5.71 7.21,1.02
LQFP144 [mm]
  oval 0.254x2.54 smd: 1(0,0) 2(0.5,0) 3(1,0) 4(1.5,0) 5(2,0) 6(2.5,0) 7(3,0) 8(3.5,0) 9(4,0) 10(4.5,0) 11(5,0) 12(5.5,0) 13(6,0) 14(6.5,0) 15(7,0) 16(7.5,0) 17(8,0) 18(8.5,0) 19(9,0) 20(9.5,0) 21(10,0) 22(10.5,0) 23(11,0) 24(11.5,0) 25(12,0) 26(12.5,0) 27(13,0) 28(13.5,0) 29(14,0) 30(14.5,0) 31(15,0) 32(15.5,0) 33(16,0) 34(16.5,0) 35(17,0) 36(17.5,0) 73(17.5,22) 74(17,22) 75(16.5,22) 76(16,22) 77(15.5,22) 78(15,22) 79(14.5,22) 80(14,22) 81(13.5,22) 82(13,22) 83(12.5,22) 84(12,22) 85(11.5,22) 86(11,22) 87(10.5,22) 88(10,22) 89(9.5,22) 90(9,22) 91(8.5,22) 92(8,22) 93(7.5,22) 94(7,22) 95(6.5,22) 96(6,22) 97(5.5,22) 98(5,22) 99(4.5,22) 100(4,22) 101(3.5,22) 102(3,22) 103(2.5,22) 104(2,22) 105(1.5,22) 106(1,22) 107(0.5,22) 108(0,22)
  oval 2.54x0.254 smd: 37(19.75,2.25) 38(19.75,2.75) 39(19.75,3.25) 40(19.75,3.75) 41(19.75,4.25) 42(19.75,4.75) 43(19.75,5.25) 44(19.75,5.75) 45(19.75,6.25) 46(19.75,6.75) 47(19.75,7.25) 48(19.75,7.75) 49(19.75,8.25) 50(19.75,8.75) 51(19.75,9.25) 52(19.75,9.75) 53(19.75,10.25) 54(19.75,10.75) 55(19.75,11.25) 56(19.75,11.75) 57(19.75,12.25) 58(19.75,12.75) 59(19.75,13.25) 60(19.75,13.75) 61(19.75,14.25) 62(19.75,14.75) 63(19.75,15.25) 64(19.75,15.75) 65(19.75,16.25) 66(19.75,16.75) 67(19.75,17.25) 68(19.75,17.75) 69(19.75,18.25) 70(19.75,18.75) 71(19.75,19.25) 72(19.75,19.75) 109(-2.25,19.75) 110(-2.25,19.25) 111(-2.25,18.75) 112(-2.25,18.25) 113(-2.25,17.75) 114(-2.25,17.25) 115(-2.25,16.75) 116(-2.25,16.25) 117(-2.25,15.75) 118(-2.25,15.25) 119(-2.25,14.75) 120(-2.25,14.25) 121(-2.25,13.75) 122(-2.25,13.25) 123(-2.25,12.75) 124(-2.25,12.25) 125(-2.25,11.75) 126(-2.25,11.25) 127(-2.25,10.75) 128(-2.25,10.25) 129(-2.25,9.75) 130(-2.25,9.25) 131(-2.25,8.75) 132(-2.25,8.25) 133(-2.25,7.75) 134(-2.25,7.25) 135(-2.25,6.75) 136(-2.25,6.25) 137(-2.25,5.75) 138(-2.25,5.25) 139(-2.25,4.75) 140(-2.25,4.25) 141(-2.25,3.75) 142(-2.25,3.25) 143(-2.25,2.75) 144(-2.25,2.25)
  silkscreen extent -0.76,0 17.82,20.13
M0805 [mil]
  rect 60x50 smd: 1(-49.68,-0.37) 2(50.32,-0.37)
  silkscreen extent -95,-45 95,45, body extent -39,-25 39,25, height 31
M1206 [mm]
  rect 1.8x1.6 smd: 1(-1.9,0) 2(1.9,0)
  silkscreen extent -3.1,-1.3 3.1,1.3, body extent -1.96,-1.3 1.9,1.3, height 1.5
PZ-4-0.8B [mil]
  rect 20x39.37 smd: 1(0,-10)
  oval 20x39.37 smd: 2(32,-10) 3(64,-10) 4(96,-10) 5(96,74) 6(64,74) 7(32,74) 8(0,74)
  silkscreen extent -16,-50 112,88
SIP2.54-2 [mil]
  rect 60x60 hole 40: 1(0,0)
  round 60 hole 40: 2(100,0)
  silkscreen extent -50,-50 150,50, body extent -53,-53 153,53, height 945
SIP2.54-11 [mm]
  rect 1.5x1.5 hole 0.9: 1(0,0)
  round 1.5 hole 0.9: 2(-2.54,0) 3(-5.08,0) 4(-7.62,0) 5(-10.16,0) 6(-12.7,0) 7(-15.24,0) 8(-17.78,0) 9(-20.32,0) 10(-22.86,0) 11(-25.4,0)
  silkscreen extent -26.72,-1.27 1.27,1.27, body extent -26.72,-1.27 1.27,1.27, height 24
SIP2.54-18 [mm]
  rect 1.5x1.5 hole 0.9: 1(0,0)
  round 1.5 hole 0.9: 2(2.54,0) 3(5.08,0) 4(7.62,0) 5(10.16,0) 6(12.7,0) 7(15.24,0) 8(17.78,0) 9(20.32,0) 10(22.86,0) 11(25.4,0) 12(27.94,0) 13(30.48,0) 14(33.02,0) 15(35.56,0) 16(38.1,0) 17(40.64,0) 18(43.18,0)
  silkscreen extent -1.27,-1.3 44.45,1.3, body extent -1.27,-1.3 44.5,1.3, height 24
SO-8 [mm]
  rect 2.4x0.8 smd: 1(0,0)
  oval 2.4x0.8 smd: 2(0,-1.27) 3(0,-2.54) 4(0,-3.81) 5(5.08,-3.81) 6(5.08,-2.54) 7(5.08,-1.27) 8(5.08,0)
  silkscreen extent 0,-4.7 5.08,0.89, body extent -0.38,-4.32 5.62,0.58
so-8 [mm]
  rect 2.4x0.8 smd: 1(0,0)
  oval 2.4x0.8 smd: 2(0,-1.27) 3(0,-2.54) 4(0,-3.81) 5(5.08,-3.81) 6(5.08,-2.54) 7(5.08,-1.27) 8(5.08,0)
  silkscreen extent 0,-4.7 5.08,0.89, body extent -0.38,-4.32 5.62,0.58
SOP4 [mil] "TLP281"
  rect 64x24 smd: 1(0,0)
  oval 64x24 smd: 2(0,-50) 3(240,-50) 4(240,0)
  silkscreen extent 39,-75 201,31, body extent 34,-80 206,36, height 59
SOP-16 [mm] "网络变压器1102"
  rect 2x0.8 smd: 1(0,0)
  oval 2x0.8 smd: 2(0,-1.27) 3(0,-2.54) 4(0,-3.81) 5(0,-5.08) 6(0,-6.35) 7(0,-7.62) 8(0,-8.89) 9(10.172,-8.89) 10(10.172,-7.62) 11(10.172,-6.35) 12(10.172,-5.08) 13(10.172,-3.81) 14(10.172,-2.54) 15(10.172,-1.27) 16(10.172,0)
  silkscreen extent 1.73,-9.6 8.41,0.66, body extent 1.73,-9.6 8.41,0.66, height 6
SOT-23-5+ [mm]
  rect 1.016x0.3 smd: 1(0,0) 2(0,-0.7) 3(0,-1.4) 4(2.794,-1.4) 5(2.794,0)
  silkscreen extent 0.76,-1.79 2.05,0.46
SOT-23B_N [mm]
  rect 1.15x0.6 smd: 1(-1.125,0.95) 2(-1.125,-0.95) 3(1.125,0)
  silkscreen extent -1.25,-1.5 0.7,1.92, body extent -1.35,-1.46 1.12,1.46, height 1
SOT-143 [mm]
  rect 0.9x1.2 smd: 1(0,0)
  rect 0.6x1.2 smd: 2(1.92,0) 3(1.92,2.64) 4(0,2.64)
  silkscreen extent -1,-0.83 3.03,3.52
TO-252-1 [mm]
  rect 1.4x2 smd: 1(0,0) 2(2.311,0) 3(4.623,0)
  rect 7x9 smd: 4(2.3,7.3)
  silkscreen extent -1.72,1.52 6.26,7.51
TP [mil] "test point"
  round 80 hole 40: 1(0,0)
  silkscreen extent -59,-59 59,59
TSSOP28N [mm]
  rect 1.78x0.42 smd: 1(0,0)
  oval 1.78x0.42 smd: 2(0,-0.65) 3(0,-1.3) 4(0,-1.95) 5(0,-2.6) 6(0,-3.25) 7(0,-3.9) 8(0,-4.55) 9(0,-5.2) 10(0,-5.85) 11(0,-6.5) 12(0,-7.15) 13(0,-7.8) 14(0,-8.45) 15(7,-8.45) 16(7,-7.8) 17(7,-7.15) 18(7,-6.5) 19(7,-5.85) 20(7,-5.2) 21(7,-4.55) 22(7,-3.9) 23(7,-3.25) 24(7,-2.6) 25(7,-1.95) 26(7,-1.3) 27(7,-0.65) 28(7,0)
  silkscreen extent -1.52,-8.78 5.42,0.32
XTAL-D [mil] "25MHz 晶体"
  round 68 hole 32: 1(0,0) 2(200,0)
  silkscreen extent -113,-85 313,85
XTAL-XO53 [mm]
  rect 1.6x2 smd: 1(0,0) 2(2.54,0) 3(2.54,2.794) 4(0,2.794)
  silkscreen extent -1.9,-1.07 3.76,2.87
YND5-48D12 [mm]
  rect 3.81x3.81 hole 1.5: 1(0,-2.54)
  round 3.81 hole 1.5: 2(0,2.54) 3(20.32,10.16) 4(20.32,0) 5(20.32,-10.16)
  silkscreen extent -2.7,-12.81 23,12.79, body extent -2.7,-12.81 23,12.79, height 7

## Part data
C2 C6 C10 C12 C14 C19 C25 C28 C55 C61 C64: library part E
C3 C8 C9 C11 C13 C16 C17 C18 C20 C21 C22 C23 C24 C26 C27 C29 C33 C35 C36 C37 C46 C53 C54 C57 C58 C63 C65 C67 C68 C71 C72 C76 C78 C80: library part CAP, "Capacitor"
C7 C38 C45 C66 C69 C77: library part "CAPACITOR POL", "Capacitor"
C15 C30 C56 C59 C62 C70 C74: library part CAP2, "Bi-Polar Capacitor"
C31 C34 C39 C40 C41 C42 C43 C44 C47 C48 C49 C50 C51 C52: library part CAP
C60: library part Cap, "Capacitor"
D1 D2 D3 D14 D15 D16 D17 D19: "Default Diode"
D4: library part DIODE, "Diode"
D7: library part D
D10 D13: library part "DIODE SCHOTTKY", "Schottky Diode"
J1 J3 J4 J6: "Connector"
J2: library part "HEADER 10X2"
JP1: library part TX
L2 L3: library part INDUCTOR
L6: library part INDUCTOR1
LED1 LED2: library part LED
O4 O5 O6 O7 O8 O9 O10: library part Optoisolator1, "4-Pin Phototransistor Optocoupler"
Q1: library part NPN, "NPN Bipolar Transistor"
R1 R5 R7 R9 R10 R23 R24 R25 R32 R37 R38 R43 R49 R55 R56 R57 R58 R59 R60 R61 R62 R63 R64 R68 R70 R71 R74 R75 R76 R80 R83 R85 R89 R94 R97 R98 R99 R103 R105: library part Res3, "Resistor"
R2 R3 R8 R11 R12 R13 R14 R15 R18 R19 R20 R21 R22 R28 R29 R30 R31 R33 R34 R35 R36 R40 R42 R44 R45 R46 R47 R48 R53 R54 R65 R66: library part RES1
R4 R17 R26: library part RES-P4
R6: "Resistor"
Re1: library part G6J-2P
T6: library part TRANS7
U9: library part AT24C32
U10: library part YND5-48D12
U12: library part LT1085
X1: library part CRYSTAL, "Crystal"
Y1 Y2: library part XTAL

## Free pads (board coordinates)
  round 5.08 hole 3: 8(3,3) 8(3,93) 8(83,93)

## Via types
v1: diameter 1.016, hole 0.508, Top Layer to Bottom Layer, 122 vias
v2: diameter 0.762, hole 0.381, Top Layer to Bottom Layer, 48 vias
v3: diameter 0.889, hole 0.381, Top Layer to Bottom Layer, 37 vias
v4: diameter 1.27, hole 0.635, Top Layer to Bottom Layer, 28 vias
v5: diameter 1.27, hole 0.711, Top Layer to Bottom Layer, 20 vias
v6: diameter 0.762, hole 0.457, Top Layer to Bottom Layer, 11 vias
v7: diameter 1.143, hole 0.635, Top Layer to Bottom Layer, 1 vias

## Nets (pads, with @x,y where several pads share a name; then routed paths per layer and width w, separated by ;. In a path a pad name is that pad's centre, name@x,y a point inside that pad or via, vN(x,y) a via of type N, cw(c..) or ccw(c..) an arc to the next point about the centre after c; other vN are vias at no path point)
0DB_CPU: J5.6 U1.56 | length 35.9
  Top Layer w0.254: J5.6@4,52.3 6.831,52.3 7.747,51.384 7.747,41.3 8.981,40.066 U1.56@21.423,40.066 ; 4.891,52.3 cw(c4.891,53.191) 4.261,52.561 ccw(c4.891,53.191) 4.891,52.3 ; 4.891,52.3 ccw(c4.891,51.409) 4.261,52.039 cw(c4.891,51.409) 4.891,52.3 ; 5.504,52.3 cw(c5.504,53.804) 4.441,52.741 ccw(c5.504,53.804) 5.504,52.3 ; 5.504,52.3 ccw(c5.504,50.796) 4.441,51.859 cw(c5.504,50.796) 5.504,52.3
+3DB_CPU: J5.5 U1.55 | length 38.1
  Top Layer w0.254: J5.5@4,54.84 7.601,54.84 8.306,54.136 8.306,41.707 9.447,40.566 U1.55@21.423,40.566 ; 4.891,54.84 cw(c4.891,55.731) 4.261,55.101 ccw(c4.891,55.731) 4.891,54.84 ; 4.891,54.84 ccw(c4.891,53.949) 4.261,54.579 cw(c4.891,53.949) 4.891,54.84 ; 5.504,54.84 cw(c5.504,56.344) 4.441,55.281 ccw(c5.504,56.344) 5.504,54.84 ; 5.504,54.84 ccw(c5.504,53.336) 4.441,54.399 cw(c5.504,53.336) 5.504,54.84
+24VGND: D1.K D2.K J6.6 | length 12
  Bottom Layer w1.27: 38.94,91.59 ccw(c40.567,91.59) D2.K@39.417,90.439 ; J6.6@38.94,93 38.94,90.835 39.51,90.265 D2.K@39.51,90.215 ; D2.K@39.764,90.011 D1.K@43.345,90.011 ; D2.K@40.052,90.439 ccw(c41.084,91.472) 41.084,90.011 ; 42.099,90.011 ccw(c42.099,91.905) 43.438,90.566 cw(c42.099,91.905) 42.099,90.011
-3DB_CPU: J5.7 U1.57 | length 33.7
  Top Layer w0.254: J5.7@4,49.76 6.196,49.76 7.214,48.743 7.214,40.945 8.592,39.566 U1.57@21.423,39.566 ; 4.891,49.76 cw(c4.891,50.651) 4.261,50.021 ccw(c4.891,50.651) 4.891,49.76 ; 4.891,49.76 ccw(c4.891,48.869) 4.261,49.499 cw(c4.891,48.869) 4.891,49.76 ; 5.504,49.76 cw(c5.504,51.264) 4.441,50.201 ccw(c5.504,51.264) 5.504,49.76 ; 5.504,49.76 ccw(c5.504,48.256) 4.441,49.319 cw(c5.504,48.256) 5.504,49.76
-6DB_CPU: J5.8 U1.58 | length 31.3
  Top Layer w0.254: J5.8@4,47.22 5.485,47.22 ; U1.58@21.423,39.066 8.229,39.066 6.68,40.615 6.68,46.025 5.485,47.22 ; 4.88,47.22 cw(c4.88,48.084) 4.263,47.479 ccw(c4.88,48.084) 4.88,47.22 ; 4.88,47.22 ccw(c4.88,46.356) 4.263,46.961 cw(c4.88,46.356) 4.88,47.22 ; 5.485,47.22 cw(c5.485,48.678) 4.445,47.657 ccw(c5.485,48.678) 5.485,47.22 ; 5.485,47.22 ccw(c5.485,45.762) 4.445,46.783 cw(c5.485,45.762) 5.485,47.22
-9DB_CPU: J5.9 U1.59 | length 24.2
  Top Layer w0.254: J5.9@4,44.68 5.028,44.68 ; U1.59@21.423,38.566 7.891,38.566 6.121,40.335 6.121,43.586 5.028,44.68 ; 5.028,44.68 cw(c5.028,45.216) 4.552,44.968 ccw(c5.028,45.216) 5.028,44.68 ; 5.028,44.68 ccw(c5.028,44.144) 4.552,44.392 cw(c5.028,44.144) 5.028,44.68
AC1+3.3V: C68.1 C69.1 L6.1 U11.3 U11.7 U11.25 | length 25.4
  Top Layer w0.381: L6.1@13.818,23.821 U11.3@17.374,23.821 ; v2(15.138,20.549) 15.367,20.549 16.039,21.221 U11.7@17.374,21.221 ; U11.25@24.374,23.171 26.642,23.171 27.512,22.3 C68.1@29.201,22.3 ; L6.1@13.687,23.55 cw(c14.34,22.896) 14.34,23.821 ccw(c14.34,22.896) L6.1@13.687,23.55 ; L6.1@13.687,23.999 ccw(c14.117,24.429) 14.117,23.821 cw(c14.117,24.429) L6.1@13.687,23.999 ; L6.1@14.222,23.396 cw(c15.248,22.37) 15.248,23.821 ccw(c15.248,22.37) L6.1@14.222,23.396 ; L6.1@14.222,24.204 ccw(c15.147,25.129) 15.147,23.821 cw(c15.147,25.129) L6.1@14.222,24.204 ; v2@15.138,20.739 ccw(c15.138,21.751) 15.854,21.035 cw(c15.138,21.751) v2@15.138,20.739 ; 27.66,22.3 ccw(c27.66,23.46) 28.48,22.64 cw(c27.66,23.46) 27.66,22.3 ; 27.783,22.3 cw(c27.783,21.314) 28.48,22.011 ccw(c27.783,21.314) 27.783,22.3 ; 28.074,22.3 ccw(c28.074,23.157) 28.681,22.551 cw(c28.074,23.157) 28.074,22.3 ; C68.1@28.203,22.3 cw(c28.203,21.624) 28.681,22.102 ccw(c28.203,21.624) C68.1@28.203,22.3
  other v1: 28.905,22.327 13.462,23.774
  other v4: 10.363,27.762
AC2+3.3V: C20.2 IC2.22 L3.2 R48.1 | length 14
  Top Layer w0.178: IC2.22@55.417,57.14 55.417,56.14 55.956,55.601 ; v1@55.956,54.254 55.956,55.601 ; 55.956,55.601 cw(c54.589,55.601) 55.441,54.531 ccw(c54.589,55.601) 55.956,55.601 ; v1@55.552,54.392 ccw(c54.883,55.232) 55.956,55.232 cw(c54.883,55.232) v1@55.552,54.392 ; v1@55.663,54.253 ccw(c55.177,54.863) 55.956,54.863 cw(c55.177,54.863) v1@55.663,54.253
  Bottom Layer w0.178: C20.2@55.956,53.932 v1@55.956,54.254 ; v1@55.956,54.254 cw(c55.737,54.254) 55.752,54.036 ccw(c55.737,54.254) v1@55.956,54.254 ; v1@55.956,54.254 ccw(c56.37,54.254) 56.119,53.925 cw(c56.37,54.254) v1@55.956,54.254
  Bottom Layer w0.889: R48.1@59.96,59.927 62.434,59.927 62.443,59.936 63.314,59.936 v1@63.348,59.969
  other v1: 55.702,54.204 63.322,59.893
ADDR1_CPU: O7.4 R56.2 U1.112 | length 78.8
  Top Layer w0.254: U1.112@43.423,33.566 69.875,33.566 71.374,35.065 71.374,58.141 74.219,60.985 82.194,60.985 83.092,61.883 R56.2@83.092,63.973 ; 83.092,62.747 cw(c84.318,62.747) 83.451,63.614 ccw(c84.318,62.747) 83.092,62.747 ; 83.092,62.747 ccw(c81.865,62.747) 82.732,63.614 cw(c81.865,62.747) 83.092,62.747
  Top Layer w0.381: R56.2@83.092,63.973 84.277,65.159 O7.4@84.277,67.107 ; R56.2@83.2,64.034 ccw(c82.915,64.973) 83.863,64.719 ; R56.2@83.219,64.418 ccw(c83.219,65.184) 83.761,64.642 cw(c83.219,65.184) R56.2@83.219,64.418 ; R56.2@83.663,63.973 cw(c85.043,63.973) 84.067,64.949 ccw(c85.043,63.973) R56.2@83.663,63.973
ADDR2_CPU: O6.4 R55.2 U1.115 | length 65.8
  Top Layer w0.254: U1.115@43.423,35.066 68.746,35.066 70.256,36.576 70.256,59.487 71.814,61.044 R55.2@71.814,63.999 ; 71.814,62.772 cw(c73.04,62.772) 72.173,63.639 ccw(c73.04,62.772) 71.814,62.772 ; 71.814,62.772 ccw(c70.588,62.772) 71.455,63.639 cw(c70.588,62.772) 71.814,62.772
  Top Layer w0.381: R55.2@71.814,63.999 72.111,64.295 O6.4@72.111,66.878 ; R55.2@71.627,64.313 ccw(c70.459,65.481) 72.111,65.481 cw(c70.459,65.481) R55.2@71.627,64.313 ; 72.111,64.662 ccw(c72.605,64.662) 72.255,64.313 cw(c72.605,64.662) 72.111,64.662
ADDR3_CPU: O9.4 R62.2 U1.114 | length 80.1
  Top Layer w0.254: U1.114@43.423,34.566 69.339,34.566 70.815,36.043 70.815,59.2 R62.2@75.608,63.992 ; 74.781,63.277 cw(c75.766,63.013) R62.2@75.481,63.992 ; R62.2@74.898,63.713 cw(c75.618,63.52) R62.2@75.409,64.236 ; 74.524,62.908 ccw(c73.44,63.992) 74.973,63.992 cw(c73.44,63.992) 74.524,62.908 ; 74.83,63.215 cw(c75.481,62.564) 75.481,63.484 ccw(c75.481,62.564) 74.83,63.215 ; 74.957,63.342 ccw(c74.307,63.992) 75.227,63.992 cw(c74.307,63.992) 74.957,63.342
  Top Layer w0.381: R62.2@75.608,63.992 75.608,64.686 ; 78.036,65.976 cw(c78.666,65.807) O9.4@78.34,66.373 ; O9.4@78.283,66.98 78.283,66.142 77.546,65.405 76.327,65.405 ; 75.608,64.686 cw(c75.289,64.686) 75.422,64.396 ccw(c75.289,64.686) 75.608,64.686 ; 75.608,64.686 ccw(c75.926,64.686) 75.793,64.396 cw(c75.926,64.686) 75.608,64.686 ; 75.608,64.686 76.327,65.405 ; 76.327,65.405 ccw(c77.069,64.663) 76.132,64.192 cw(c77.069,64.663) 76.327,65.405 ; R62.2@75.451,63.849 cw(c76.077,64.164) 75.581,64.659 ccw(c76.077,64.164) R62.2@75.451,63.849 ; R62.2@75.791,64.021 cw(c76.573,64.414) 75.954,65.032 ccw(c76.573,64.414) R62.2@75.791,64.021 ; 77.854,65.713 ccw(c77.095,66.472) 78.169,66.472 cw(c77.095,66.472) 77.854,65.713
ADDR4_CPU: O8.4 R61.2 U1.116 | length 87.1
  Top Layer w0.254: U1.116@43.423,35.566 68.23,35.566 69.698,37.033 69.698,59.715 67.691,61.722
  Top Layer w0.381: R61.2@64.195,63.616 cw(c63.513,62.529) 64.763,62.815 ; R61.2@64.316,64.421 ccw(c64.167,64.972) 64.718,64.824 ccw(c65.446,64.629) R61.2@64.808,64.228 ; R61.2@64.398,63.938 cw(c63.537,62.567) 65.115,62.928 ; R61.2@64.4,64.047 ccw(c63.613,65.432) 65.151,65.02 ; 64.697,63.104 cw(c65.539,63.296) R61.2@64.808,63.756 ; 65.768,65.849 cw(c66.398,65.68) O8.4@66.072,66.246 ; O8.4@66.015,66.116 64.305,64.406 R61.2@64.305,63.992 64.305,63.178 ; 67.691,61.722 65.761,61.722 ; 64.305,63.178 cw(c64.828,63.178) 64.545,63.618 ccw(c64.828,63.178) 64.305,63.178 ; 64.305,63.178 ccw(c63.782,63.178) 64.064,63.618 cw(c63.782,63.178) 64.305,63.178 ; 64.305,63.178 65.761,61.722 ; 65.76,61.722 cw(c67.901,63.863) 64.876,63.975 ccw(c67.901,63.863) 65.76,61.722 ; R61.2@64.114,64.004 ccw(c65.519,63.952) 64.525,62.958 cw(c65.519,63.952) R61.2@64.114,64.004 ; R61.2@64.495,63.99 ccw(c66.71,63.907) 65.143,62.34 cw(c66.71,63.907) R61.2@64.495,63.99 ; R61.2@64.495,63.992 cw(c65.955,63.992) 64.923,65.024 ccw(c65.955,63.992) R61.2@64.495,63.992 ; R61.2@64.876,63.992 cw(c67.256,63.992) 65.573,65.675 ccw(c67.256,63.992) R61.2@64.876,63.992 ; 65.658,65.759 ccw(c65.072,66.345) 65.9,66.345 cw(c65.072,66.345) 65.658,65.759
  Top Layer w0.508: O8.4@66.015,66.116 O8.4@66.015,66.853